# Altium PCB DamperSectionPCB.PcbDoc
Units mil, origin at the board's own origin, x right, y up, seen from the top; angles counter-clockwise.
Board outline 6000 x 6000 mil, 6 copper layers (Top Layer, Internal Plane 1, WireLayer 2, Internal Plane 2, Wire layer 3, Bottom Layer); 85 components, 73 nets, 281 pads, 64 vias.
Unrouted connection lines stored in the file: 2.
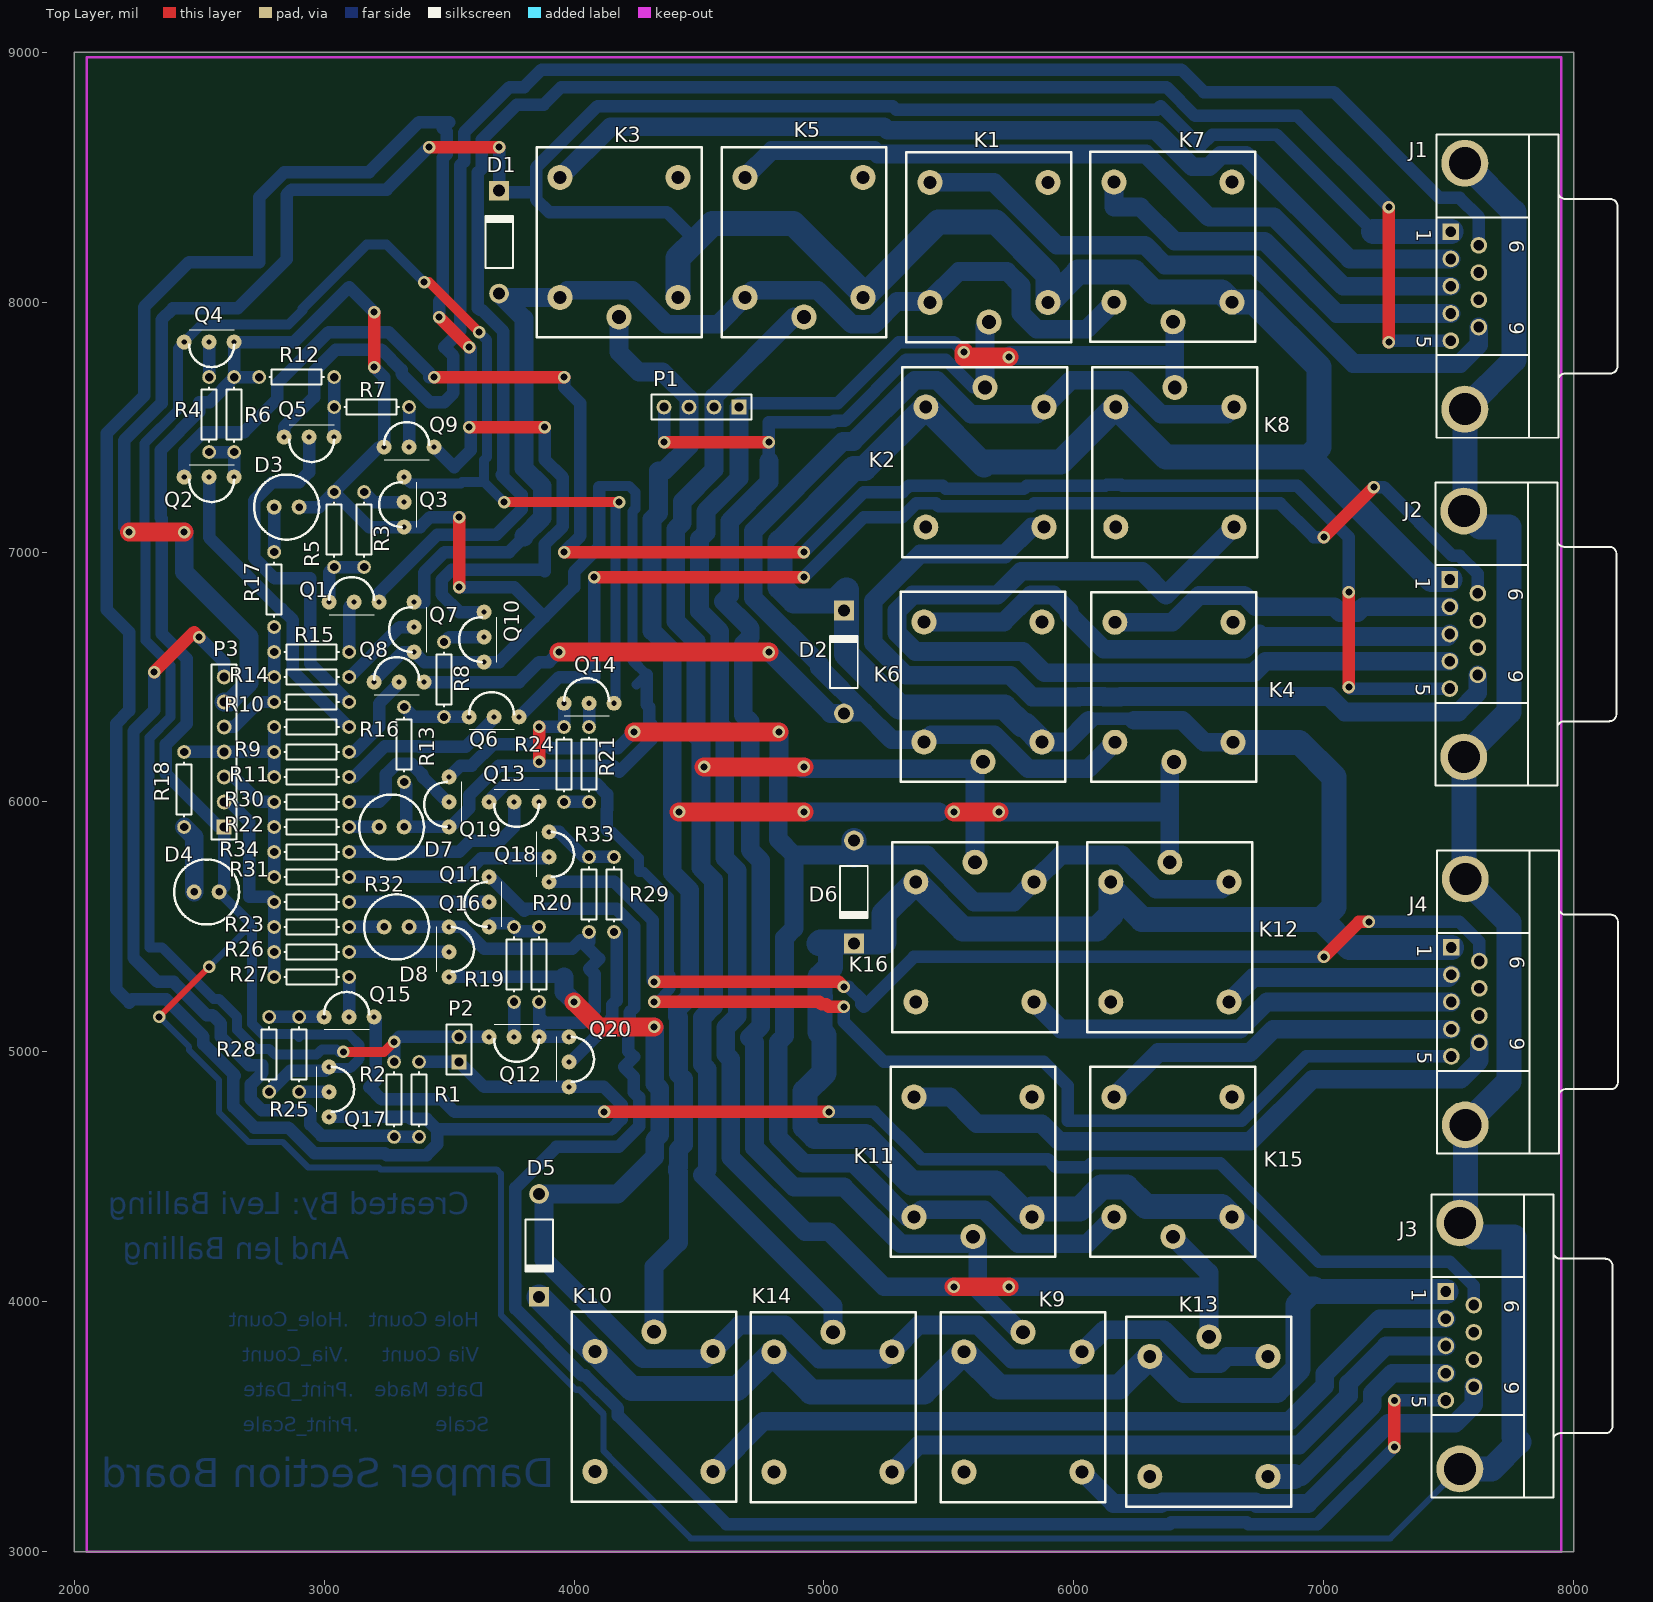
[diagram p0: Top Layer view]
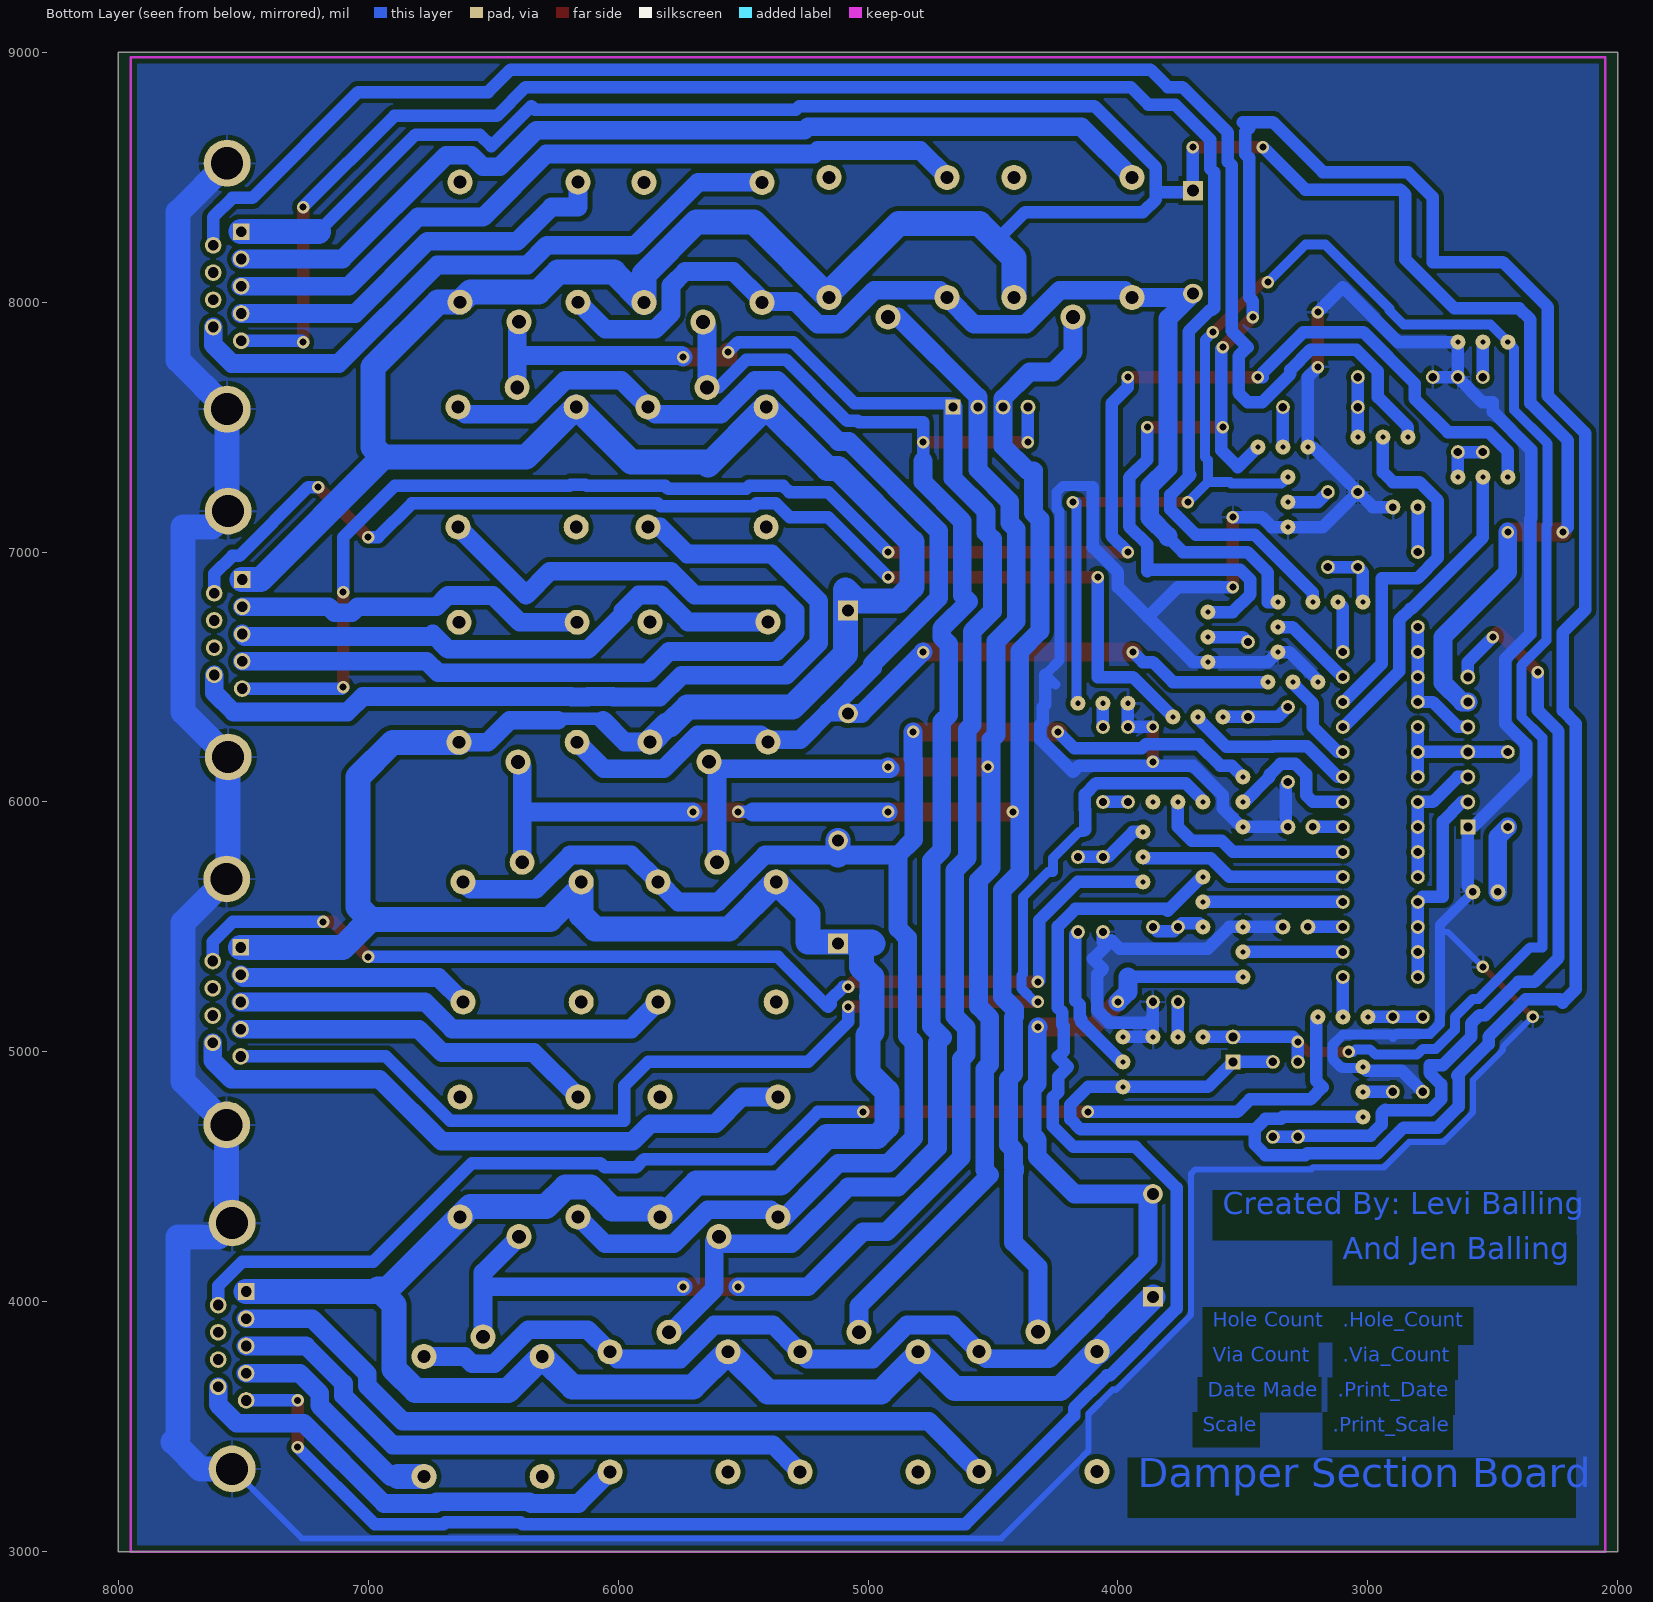
[diagram p1: Bottom Layer view, seen from below]
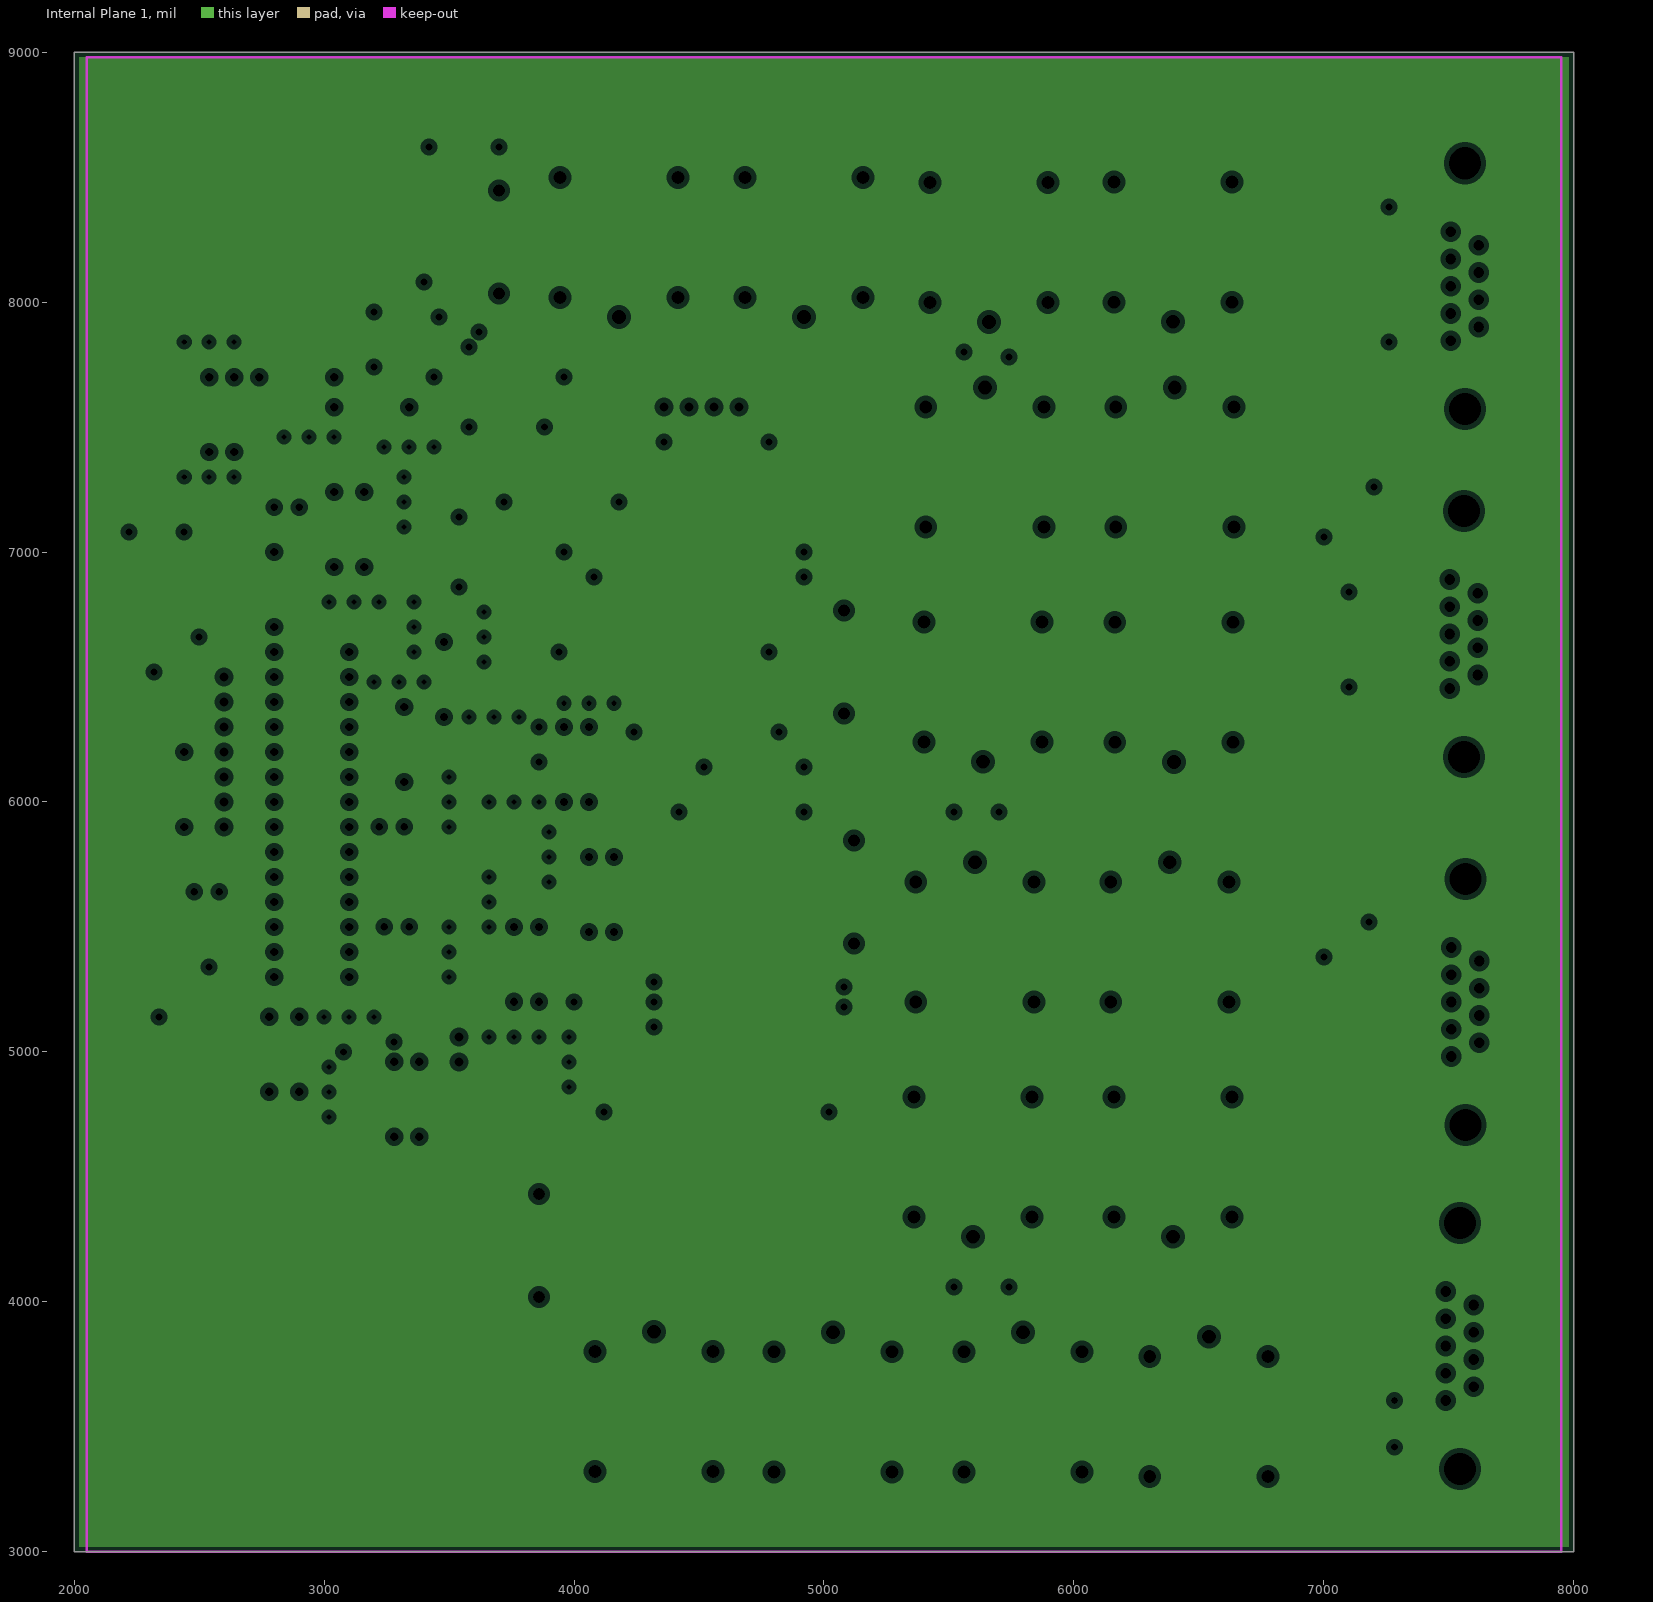
[diagram p2: Internal Plane 1, clearances drawn from the general rule]
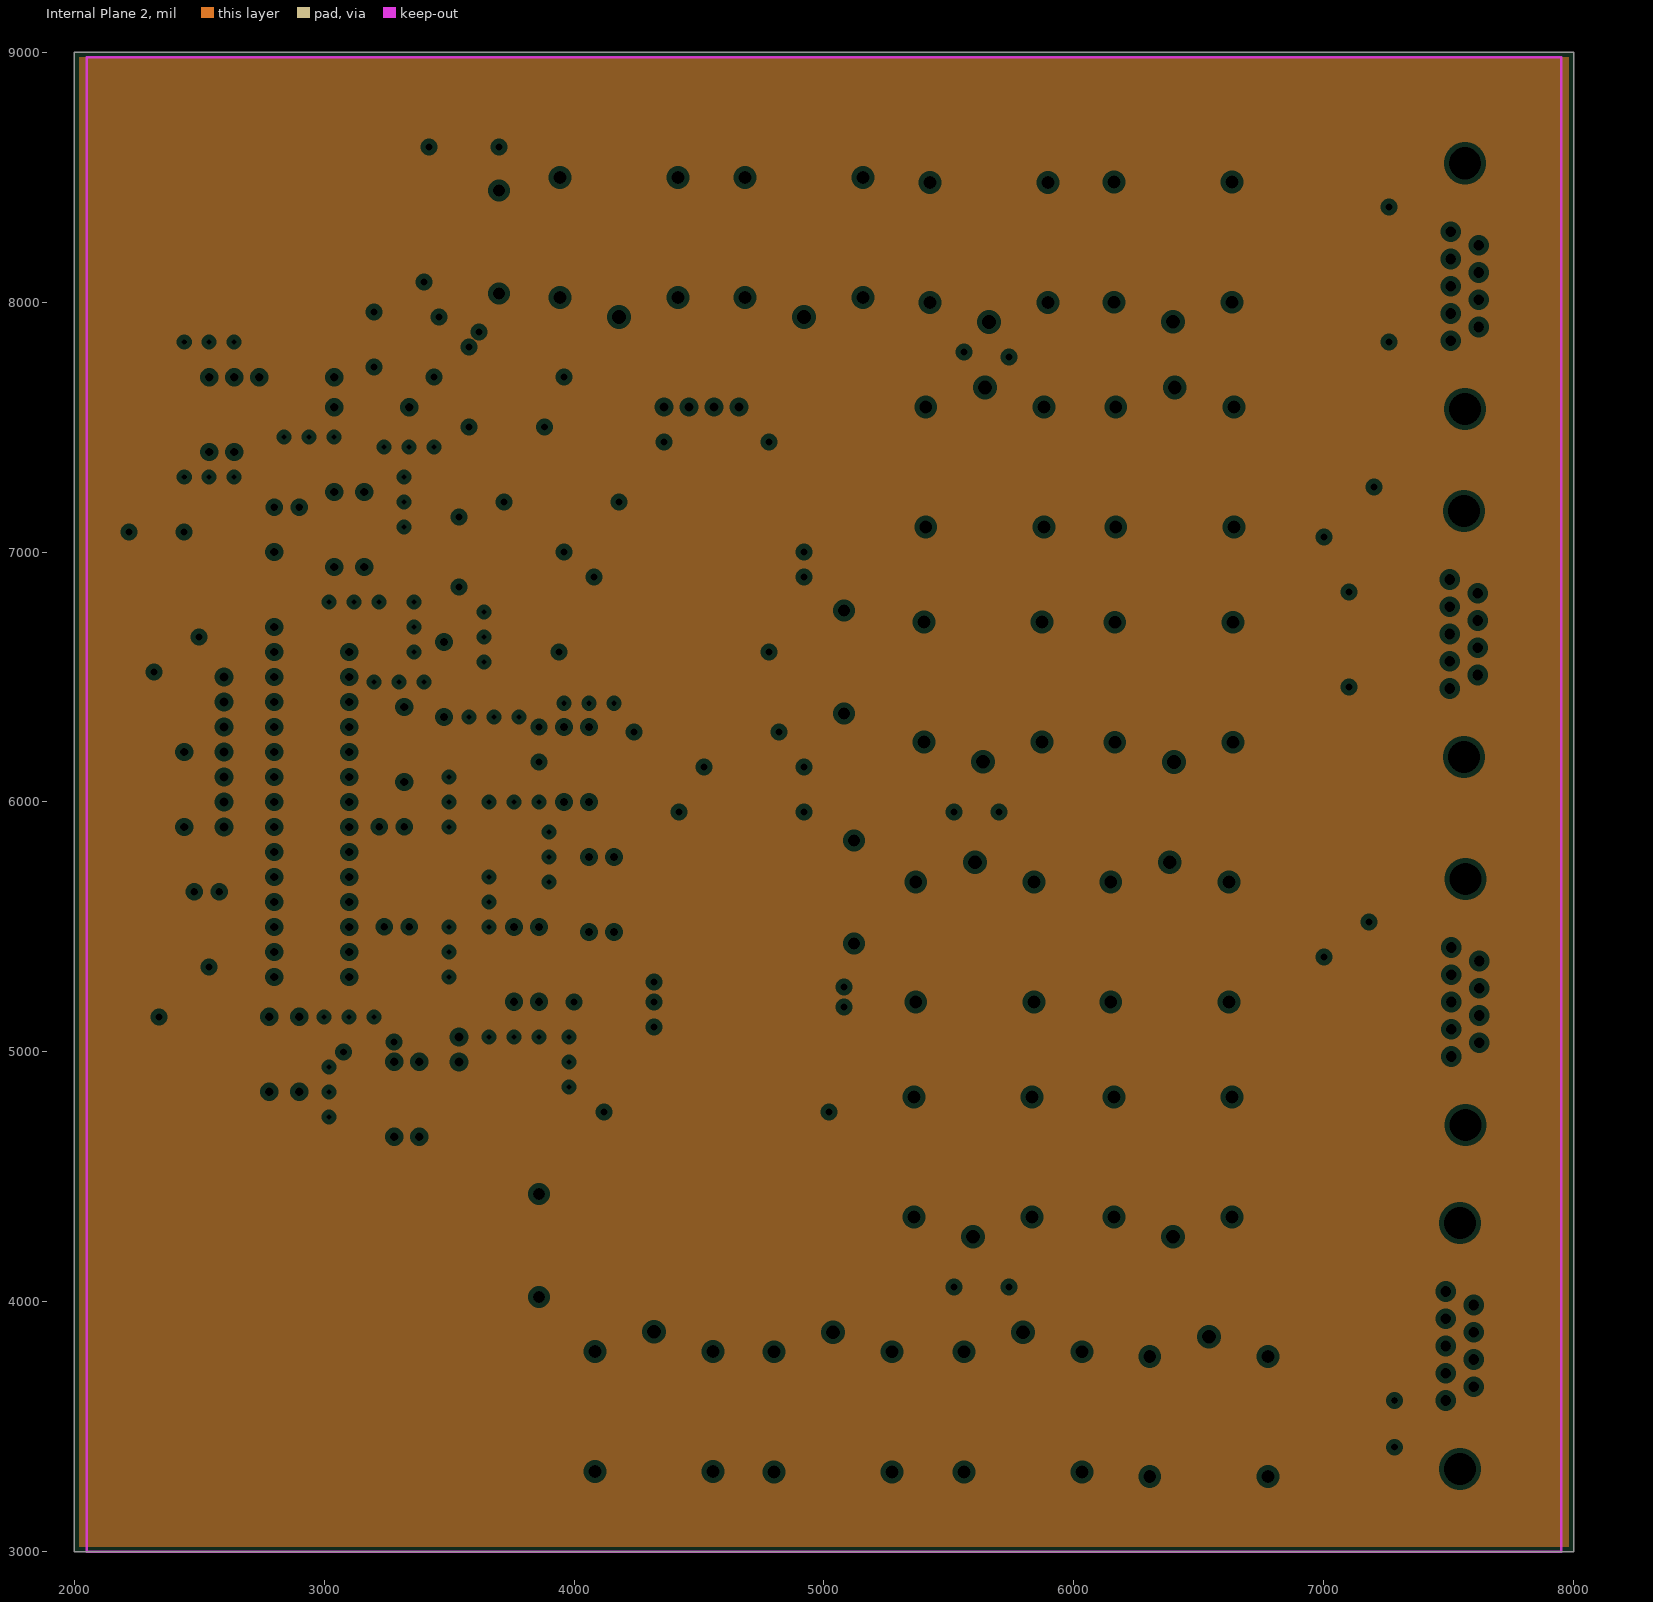
[diagram p3: Internal Plane 2, clearances drawn from the general rule]

## Layer stack, top to bottom
Top Layer: signal copper 1.4
Dielectric: core 12.6, FR-4, Dk 4.8
Internal Plane 1: plane copper 1.4
Dielectric: prepreg 12.6, FR-4, Dk 4.8
WireLayer 2: signal copper 1.4
Dielectric: core 12.6, FR-4, Dk 4.8
Internal Plane 2: plane copper 1.4
Dielectric: prepreg 12.6, FR-4, Dk 4.8
Wire layer 3: signal copper 1.4
Dielectric: core 12.6, FR-4, Dk 4.8
Bottom Layer: signal copper 1.4

## Board outline
2000,3000 8000,3000 8000,9000 2000,9000

## Design rules (kind name [scope] priority, off if disabled: settings)
Clearance [All] p1: gap=20
PlaneClearance [All] p1: clearance=20
PlaneConnect [All] p1: planeconnectstyle=Relief reliefexpansion=20 reliefentries=4 reliefconductorwidth=10 reliefairgap=10
PolygonConnect [All] p1: connectstyle=Relief reliefconductorwidth=10 reliefentries=4 polygonreliefangle="90 Angle"
RoomDefinition DamperSection [InComponentClass('DamperSection')] p1: confinementstyle=ConfineIn formatcopy=TRUE lockcomponents=FALSE outline 7950,3000 2050,3000 2050,8980 7950,8980
RoutingVias [All] p1: holewidth=32 width=62 viastyle="Through Hole" minholewidth=28 minwidth=50 maxholewidth=28 maxwidth=50
SilkscreenOverComponentPads [All] p1: minsilkscreentomaskgap=10
SolderMaskExpansion [All] p1: expansion=4
Width [All] p1: maxlimit=100 minlimit=25 preferedwidth=25 midlayer1_maxwidth=25 midlayer2_maxwidth=25 minimp=50.000000 maximp=50.000000 favimp=50.000000
25 further rules are at their usual default settings.

## Components (designator, comment, footprint, x,y, rotation, side; value= is the part's Value field where it differs from the comment)
D1 "1N4001" DO-41 3700,8240 r90 top
D2 "1N4001" DO-41 5080,6560 r90 top
D3 "LED_White" LED 2800,7180 r0 top
D4 "LED_White" LED 2480,5640 r0 top
D5 "1N4001" DO-41 3860,4225.91 r270 top
D6 "1N4001" DO-41 5120,5640 r270 top
D7 "LED_White" LED 3220,5900 r0 top
D8 "LED_White" LED 3240,5500 r0 top
J1 "D Connector 9" DSUB1.385-2H9 7938.11,8063.58 r270 top
J2 "D Connector 9" DSUB1.385-2H9 7934.02,6671.93 r270 top
J3 "D Connector 9" DSUB1.385-2H9 7918.11,3823.58 r270 top
J4 "D Connector 9" DSUB1.385-2H9 7940,5200 r270 top
K1 "SPDT" "Relay  SPDT Tayda" 5660,7920 r180 top
K2 "SPDT" "Relay  SPDT Tayda" 5643.78,7658.74 r0 top
K3 "SPDT" "Relay  SPDT Tayda" 4180,7940 r180 top
K4 "SPDT" "Relay  SPDT Tayda" 6400,6160 r180 top
K5 "SPDT" "Relay  SPDT Tayda" 4920,7940 r180 top
K6 "SPDT" "Relay  SPDT Tayda" 5636.22,6161.26 r180 top
K7 "SPDT" "Relay  SPDT Tayda" 6396.22,7920.94 r180 top
K8 "SPDT" "Relay  SPDT Tayda" 6403.78,7658.74 r0 top
K9 "SPDT" "Relay  SPDT Tayda" 5796.22,3878.74 r0 top
K10 "SPDT" "Relay  SPDT Tayda" 4320,3880 r0 top
K11 "SPDT" "Relay  SPDT Tayda" 5596.22,4260.94 r180 top
K12 "SPDT" "Relay  SPDT Tayda" 6383.78,5758.74 r0 top
K13 "SPDT" "Relay  SPDT Tayda" 6540,3860 r0 top
K14 "SPDT" "Relay  SPDT Tayda" 5036.22,3878.74 r0 top
K15 "SPDT" "Relay  SPDT Tayda" 6396.22,4260.94 r180 top
K16 "SPDT" "Relay  SPDT Tayda" 5603.78,5759.06 r0 top
P1 "Header 4" HDR1X4 4660,7580 r180 top
P2 "Header 2" HDR1X2 3540,4960 r90 top
P3 "Header 7" HDR1X7 2600,5900 r90 top
Q1 "2N3904" 2N3904 3020,6800 r0 top
Q2 "2N3904" 2N3904 2640,7300 r180 top
Q3 "2N3904" 2N3904 3320,7100 r90 top
Q4 "2N3904" 2N3904 2640,7840 r180 top
Q5 "2N3904" 2N3904 3040,7460 r180 top
Q6 "2N3904" 2N3904 3580,6340 r0 top
Q7 "2N3904" 2N3904 3360,6600 r90 top
Q8 "2N3904" 2N3904 3200,6480 r0 top
Q9 "2N3904" 2N3904 3240,7420 r0 top
Q10 "2N3904" 2N3904 3640,6560 r90 top
Q11 "2N3904" 2N3904 3660,5500 r90 top
Q12 "2N3904" 2N3904 3860,5060 r180 top
Q13 "2N3904" 2N3904 3860,6000 r180 top
Q14 "2N3904" 2N3904 3960,6395 r0 top
Q15 "2N3904" 2N3904 3000,5140 r0 top
Q16 "2N3904" 2N3904 3500,5500 r270 top
Q17 "2N3904" 2N3904 3020,4940 r270 top
Q18 "2N3904" 2N3904 3900,5880 r270 top
Q19 "2N3904" 2N3904 3500,5900 r90 top
Q20 "2N3904" 2N3904 3980,5060 r270 top
R1 "Res1" AXIAL-0.3 3380,4810 r270 top
R2 "Res1" AXIAL-0.3 3280,4810 r270 top
R3 "Res1" AXIAL-0.3 3160,7090 r90 top
R4 "Res1" AXIAL-0.3 2540,7550 r90 top
R5 "Res1" AXIAL-0.3 3040,7090 r270 top
R6 "Res1" AXIAL-0.3 2640,7550 r270 top
R7 "Res1" AXIAL-0.3 3190,7580 r0 top
R8 "Res1" AXIAL-0.3 3480,6490 r90 top
R9 "Res1" AXIAL-0.3 2950,6200 r0 top
R10 "Res1" AXIAL-0.3 2950,6400 r0 top
R11 "Res1" AXIAL-0.3 2950,6100 r0 top
R12 "Res1" AXIAL-0.3 2890,7700 r0 top
R13 "Res1" AXIAL-0.3 3320,6230 r90 top
R14 "Res1" AXIAL-0.3 2950,6500 r0 top
R15 "Res1" AXIAL-0.3 2950,6600 r0 top
R16 "Res1" AXIAL-0.3 2950,6300 r0 top
R17 "Res1" AXIAL-0.3 2800,6850 r90 top
R18 "Res1" AXIAL-0.3 2440,6050 r270 top
R19 "Res1" AXIAL-0.3 3760,5350 r270 top
R20 "Res1" AXIAL-0.3 3860,5350 r90 top
R21 "Res1" AXIAL-0.3 4060,6150 r90 top
R22 "Res1" AXIAL-0.3 2950,5900 r0 top
R23 "Res1" AXIAL-0.3 2950,5500 r0 top
R24 "Res1" AXIAL-0.3 3960,6150 r270 top
R25 "Res1" AXIAL-0.3 2900,4990 r270 top
R26 "Res1" AXIAL-0.3 2950,5400 r0 top
R27 "Res1" AXIAL-0.3 2950,5300 r0 top
R28 "Res1" AXIAL-0.3 2780,4990 r90 top
R29 "Res1" AXIAL-0.3 4160,5630 r270 top
R30 "Res1" AXIAL-0.3 2950,6000 r0 top
R31 "Res1" AXIAL-0.3 2950,5700 r0 top
R32 "Res1" AXIAL-0.3 2950,5600 r0 top
R33 "Res1" AXIAL-0.3 4060,5630 r90 top
R34 "Res1" AXIAL-0.3 2950,5800 r0 top

## Footprints (in the part's own frame and the unit in brackets; to place one, negate y for a bottom-side part, rotate by r counter-clockwise, add the part's x,y. Pads: shape width x height; smd on the part's side, far side on the other; paste and mask are expansions set on the pad)
2N3904 [mil] "simple transistor, but bigger holes and pads"
  round 60 hole 21: 1(0,0) 2(100,0) 3(200,0)
  silkscreen extent 0,-50 180,100
AXIAL-0.3 [mm] "Axial Device, Thru-Hole; 2 Leads; 0.3 in Pin Spacing"
  round 1.4 hole 0.85: 1(-3.81,0) 2(3.81,0)
  silkscreen extent -2.77,-0.76 2.77,0.76
DO-41 [mm] "Diode, Axial; Body 5.2 x 2.7 mm (LxDia. max), Lead Dia. 0.86 mm (max)"
  round 2 hole 1.2: 1(-5.23,0)
  rect 2x2 hole 1.2: 2(5.23,0)
  silkscreen extent -2.65,-1.4 2.75,1.4
DSUB1.385-2H9 [mm] "Connector; D Subminiature; 9 Position; Right Angle; Pitch 1.385 mm"
  rect 1.69x1.69 hole 1.09: 1(-5.54,-10.92)
  round 1.69 hole 1.09: 2(-2.77,-10.92) 3(0,-10.92) 4(2.77,-10.92) 5(5.54,-10.92) 6(-4.155,-8.08) 7(-1.385,-8.08) 8(1.385,-8.08) 9(4.155,-8.08)
  round 4.76 hole 3.26: 10(-12.495,-9.5) 11(12.495,-9.5)
  silkscreen extent -15.4,-12.4 15.4,6
HDR1X2 [mm] "Connector; Header; 2 Position"
  rect 1.5x1.5 hole 0.9: 1(0,0)
  round 1.5 hole 0.9: 2(2.54,0)
  silkscreen extent -1.27,-1.27 3.81,1.27
HDR1X4 [mm] "Connector; Header; 4 Position"
  rect 1.5x1.5 hole 0.9: 1(0,0)
  round 1.5 hole 0.9: 2(2.54,0) 3(5.08,0) 4(7.62,0)
  silkscreen extent -1.27,-1.27 8.89,1.27
HDR1X7 [mm] "Connector; Header; 7 Position"
  rect 1.5x1.5 hole 0.9: 1(0,0)
  round 1.5 hole 0.9: 2(2.54,0) 3(5.08,0) 4(7.62,0) 5(10.16,0) 6(12.7,0) 7(15.24,0)
  silkscreen extent -1.27,-1.27 16.51,1.27
LED [mil] "standard 5mm LED"
  round 60 hole 30: 1(0,0) 2(100,0)
  silkscreen extent -80,-130 180,130
"Relay  SPDT Tayda" [mm] "this is the ATTC-3372"
  round 2.54 hole 1.4: 0(0,0)
  round 2.54 hole 1.3: 1(6,-2) 2(-6,-2) 3(6,-14.2) 4(-6,-14.2)
  silkscreen extent -8.38,-17.27 8.38,2.03

## Part data
D1 D2 D5 D6: "1.0 Ampere General Purpose Rectifier"
D3 D4 D7 D8: library part LED0, "Typical INFRARED GaAs LED"
J1 J2 J3 J4: "Receptacle Assembly, 9 Position, Right Angle"
P1: "Header, 4-Pin"
P2: "Header, 2-Pin"
P3: "Header, 7-Pin"
Q1 Q2 Q3 Q4 Q5 Q6 Q7 Q8 Q9 Q10 Q11 Q12 Q13 Q14 Q15 Q16 Q17 Q18 Q19 Q20: "NPN General Purpose Amplifier"
R1 R2 R3 R4 R5 R6 R7 R8 R9 R10 R11 R12 R13 R14 R15 R16 R17 R18 R19 R20 R21 R22 R23 R24 R25 R26 R27 R28 R29 R30 R31 R32 R33 R34: "Resistor"

## Via types
v1: diameter 50, hole 28, Top Layer to Bottom Layer, 64 vias

## Nets (pads, with @x,y where several pads share a name; then routed paths per layer and width w, separated by ;. In a path a pad name is that pad's centre, name@x,y a point inside that pad or via, vN(x,y) a via of type N, cw(c..) or ccw(c..) an arc to the next point about the centre after c; other vN are vias at no path point)
BUTTONCLOSEBUS: P2.2 Q3.3 Q4.3 Q12.3 Q14.3 R2.1 | length 8071.4
  Top Layer w40: v1(3077.44,5000) 3240,5000 v1(3280,5040) ; v1(3400,8080) 3420,8080 v1(3620,7880) ; v1(3720,7200) v1(4180,7200)
  Bottom Layer w40: v1(3077.44,5000) 3076.94,4999.5 3059.5,4999.5 3048.99,5010 2991.01,5010 2970.5,4989.5 2802.74,4989.5 2779.8,5012.44 2727.16,5012.44 2652.44,5087.16 2652.44,5139.8 2579.68,5212.56 2557.35,5212.56 2352.35,5417.56 2302.44,5417.56 2302.44,6256.98 2385,6339.54 2385,6546.92 2285,6646.92 2285,7106.92 2281.51,7110.41 2281.51,7435.04 2415,7568.53 2415,7815 Q4.3 2510,7910 2857.47,7910 2913.74,7966.26 2913.74,7973.74 3170.6,8230.6 3249.4,8230.6 v1(3400,8080) ; Q3.3 3345,7275 3546.92,7275 3551.92,7280 3640,7280 ; v1(3620,7880) 3652.5,7847.5 3652.5,7380.58 3640,7368.08 3640,7280 ; v1(3720,7200) 3640,7280 ; Q14.3 4165,6400 v1@4165,7200
  Bottom Layer w50: R2.1 v1(3280,5040) 3300,5060 P2.2 Q12.3
BUTTONOPENBUS: P2.1 Q9.3 Q10.3 Q17.3 Q20.3 R1.1 | length 11654.5
  Top Layer w50: v1(3460,7940) v1(3580,7820) ; v1(3580,7500) v1(3882.5,7500)
  Bottom Layer w50: Q17.3 3340,4740 3347.44,4732.56 3410.05,4732.56 3452.61,4690 ; R1.1 P2.1 3640,4860 Q20.3 4118.99,4860 4190,4788.99 4190,4731.01 4148.99,4690 3452.61,4690 ; Q9.3 3520,7340 3587.5,7407.5 3587.5,7812.5 v1(3580,7820) ; v1(3460,7940) 3460,8004.37 3475.63,8020 3475.63,8576.64 3490,8591.01 3490,8681.26 3475.63,8695.63 3500,8720 3380,8720 3180,8520 2841.01,8520 2740,8418.99 2740,8160 2460,8160 2280,7980 2280,7624.45 2130,7474.45 2130,6770 2220,6680 2220,6365.46 2167.44,6312.9 2167.44,5250.95 2220.89,5197.5 2233.39,5210 2368.99,5210 2517.44,5061.55 2517.44,5031.24 2643.54,4905.15 2637.44,4899.05 2637.44,4780.95 2720.95,4697.44 2857.5,4697.44 2959.94,4595 3242.39,4595 3249.95,4587.44 3410.05,4587.44 3452.61,4630 3452.61,4690 ; Q10.3 3541.01,6760 3470,6831.01 3470,6888.99 3511.01,6930 3875,6930 3882.5,6922.5 3882.5,7030.16 3955,7102.66 3955,7297.34 3882.5,7369.84 v1(3882.5,7500)
COILA1BUS: K1.0 K2.0 K9.0 K11.0 P1.4 | length 6447.8
  Top Layer w50: v1(4360,7440) v1(4780,7440)
  Bottom Layer w50: v1(4360,7440) P1.4 ; 4780,7364.45 v1(4780,7440) 4780,7520 5036.95,7520 5041.95,7525 5083.86,7525 5328.86,7770 5486.26,7770 5597.52,7658.74 K2.0 ; K1.0@5643.74,7903.74 5643.78,7903.78 K1.0
  Bottom Layer w75: 4780,7364.45 4780,7280.73 4622.5,7123.23 4622.5,6827.32 4597.22,6802.05 4705,6694.27 4705,6659.35 4677.5,6631.85 4677.5,6348.15 4705,6320.65 4705,5807.65 4747.5,5765.15 4747.5,5102.92 4702.5,5057.92 4722.5,5037.92 4722.5,4616.77 4880,4459.27 5080,4459.27 5307.09,4232.19 5567.46,4232.19 K11.0 5615,4242.17 5615,4050.65 5786.91,3878.74 K9.0 ; K2.0 K1.0@5643.78,7903.78
COILA2BUS: K3.0 K4.0 K10.0 K12.0 P1.3 | length 6824.5
  Top Layer w75: v1(4420,5960) v1(4920,5960) ; v1(5520,5960) v1(5700,5960)
  Bottom Layer w50: 5460,5960 v1(5520,5960)
  Bottom Layer w75: K3.0 4180,7800 4260,7720 4354.35,7720 4460,7614.35 P1.3 4460,7423.33 4361.67,7325 4337.5,7325 4337.5,7155.97 4312.22,7130.7 4312.22,6684 4392.5,6603.72 4392.5,5717.1 4462.5,5647.1 4462.5,5220.97 4412.5,5170.97 4412.5,5141.85 4417.5,5136.85 4417.5,4911.51 4437.5,4891.51 4437.5,4628.49 4417.5,4608.49 4417.5,4540.65 4412.5,4535.65 4412.5,4523.72 4417.5,4518.72 4417.5,4237.5 4320,4140 K10.0 ; v1(4920,5960) 5460,5960 ; v1(5700,5960) 6383.78,5960 ; K12.0 6383.78,5960 ; K4.0 6383.78,6143.78 6383.78,5960
COILB1BUX: K5.0 K6.0 K14.0 K16.0 P1.2 | length 6132.9
  Top Layer w75: v1(4520,6140) v1(4920,6140)
  Bottom Layer w75: v1(4920,6140) 4912.5,6132.5 K6.0@5607.46,6132.5 ; K5.0 4879.63,7940 4560,7620.37 P1.2 4560,7329.43 4432.5,7201.93 4432.5,7116.62 4407.22,7091.35 4407.22,6723.35 4487.5,6643.07 4487.5,6269.45 4507.5,6249.45 4507.5,5736.45 4557.5,5686.45 4557.5,5181.62 4512.5,5136.62 4512.5,4950.86 4532.5,4930.86 4532.5,4527.5 4512.5,4507.5 5036.22,3983.78 K14.0 ; K16.0 5603.78,6128.82 K6.0@5607.46,6132.5 ; K6.0 K6.0@5607.46,6132.5
COILB2BUS: K7.0 K8.0 K13.0 K15.0 P1.1 | length 7900.3
  Top Layer w75: v1(5520,4060) v1(5740,4060) ; v1(5560,7800) 5560,7780 v1(5740,7780)
  Bottom Layer w50: P1.1 4675,7595 5054.86,7595 5299.86,7840 5520,7840 v1(5560,7800)
  Bottom Layer w75: P1.1 4660,7295.08 4527.5,7162.58 4527.5,7077.27 4502.22,7052 4502.22,6762.7 4582.5,6682.42 4582.5,6308.8 4602.5,6288.8 4602.5,5775.8 4652.5,5725.8 4652.5,5142.27 4607.5,5097.27 4607.5,4990.21 4627.5,4970.21 4627.5,4577.42 4924.92,4280 5020,4280 5240,4060 v1(5520,4060) ; v1(5740,4060) 6540,4060 ; v1(5740,7780) 5746.06,7786.06 6403.78,7786.06 ; K15.0 6540,4117.17 6540,4060 ; K7.0 6403.78,7913.39 6403.78,7786.06 ; K8.0 6403.78,7786.06 ; K13.0 6540,4060
DAMPER1: P3.5 R10.1 R14.1 R15.1 R17.1 | length 541.4
  Bottom Layer w50: P3.5 2640,6300 2740,6400 R10.1 R14.1 R15.1 R17.1
DAMPER2: P3.4 R9.1 R11.1 R16.1 R18.1 | length 560
  Bottom Layer w50: R18.1 P3.4 R9.1 ; R11.1 R9.1 ; R16.1 R9.1
DAMPER3: P3.3 R22.1 R30.1 R31.1 R34.1 | length 541.4
  Bottom Layer w50: P3.3 2640,6100 2740,6000 R30.1 R22.1 R34.1 R31.1
DAMPER4: P3.2 R23.1 R26.1 R27.1 R32.1 | length 843
  Bottom Layer w50: P3.2 2622.69,6000 2700,5922.69 2700,5620 2780,5620 R32.1 R23.1 R26.1 R27.1
GND: D3.2 D4.2 D7.2 D8.2 J1.10 J1.11 J2.10 J2.11 J3.10 J3.11 J4.10 J4.11 P3.1 Q3.1 Q4.1 Q7.1 Q8.1 Q9.1 Q10.1 Q12.1 Q14.1 Q16.1 Q17.1 Q19.1 Q20.1 R5.1 R6.1 R12.1 R13.1 R20.1 R24.1 R28.1 R33.1 | length 26482.2
  Top Layer w25: v1(2340,5140) v1(2540,5340)
  Top Layer w50: v1(3200,7740) v1(3200,7960) ; v1(3540,6860) v1(3540,7140) ; v1(3860,6160) v1(3860,6300)
  Bottom Layer w25: v1(2340,5140) 2459.94,5020.06 2459.94,5007.43 2579.94,4887.43 2579.94,4757.13 2697.13,4639.94 2833.68,4639.94 2936.12,4537.5 3218.57,4537.5 3226.13,4529.94 3690.06,4529.94 3707.5,4512.5 3707.5,3948.8 4007.54,3648.76 4020.61,3648.76 4117.95,3551.42 4117.95,3403.44 4166.28,3355.12 4166.28,3353.72 4466.56,3053.44 7265.89,3053.44 J3.11 ; v1(2540,5340) 2680,5480 2712.44,5480
  Bottom Layer w40: D4.2 2712.44,5507.56 2712.44,5480 2712.44,5112.02 2752.02,5072.44 2887.56,5072.44 2900,5060 2910,5070 3099.36,5070 3142.44,5026.92 3142.44,4973.08 3104.36,4935 3025,4935 Q17.1 ; 4100,7260 4105,7265 4220,7265 4245,7240 4245,7173.08 4234.72,7162.8 4234.72,6565.28 4290,6510 4250,6470
  Bottom Layer w50: D4.2 2600,5660 P3.1 2580,5900 2367.44,6112.56 2367.44,6230.05 2450,6312.61 2450,6573.85 2350,6673.85 2350,7133.85 2346.51,7137.34 2346.51,7408.12 2500,7561.61 2500,7600 2542.61,7600 2640,7697.39 R6.1 ; R12.1 R6.1 ; R28.1 2864.5,4924.5 3004.5,4924.5 Q17.1 ; D3.2 2980,7180 R5.1 ; Q8.1 3200,6486.07 3313.93,6600 Q7.1 3400,6560 Q10.1 3700,6560 3880,6740 ; v1(3200,7740) 3240,7700 Q9.1 3220,7420 R5.1 ; v1(3200,7960) 3099.7,8060.3 2879.4,7840 Q4.1 R6.1 ; R13.1 3320,6076.38 3328.69,6067.69 3328.69,5908.69 D7.2 Q19.1 3506.07,5900 3580,5973.93 3580,6026.07 3698.93,6145 3840,6145 ; D8.2 Q16.1 3553.93,5500 3641.32,5412.61 3992.61,5412.61 4026.31,5446.31 4046.31,5426.31 ; v1(3540,6860) 3760,6860 3880,6740 ; v1(3540,7140) 3424.02,7140 3384.02,7100 Q3.1 3180,7100 R5.1 ; R20.1 3860,5140 ; v1(3860,6160) 3855,6160 3840,6145 ; v1(3860,6300) R24.1 Q14.1 ; Q20.1 Q12.1 3860,5140 ; R33.1 4060,5440 4046.31,5426.31 ; 4100,7260 4100,7020 4000,6920 4000,6860 3880,6740 ; 4290,6510 4290,6390 4300,6380 4300,6318.99 4310,6308.99 4310,6250 4180,6120 4155,6145 3840,6145 ; 3860,5140 3882.5,5117.5 4034.17,5117.5 4082.5,5165.83 4082.5,5310.11 4060,5332.61 4100,5372.61 4046.31,5426.31
  Bottom Layer w100: J3.11 7671.65,3331.65 7780,3440 7760,3460 7760,4260 7599.61,4260 J3.10 7565.98,4337.4 J4.11 7740,4882.09 7740,5517.91 J4.10 7560,5697.91 J2.11 7740,6360 7740,7100 7623.86,7100 J2.10 7564.09,7167.95 J1.11 7760,7767.56 7760,8359.61 J1.10
NetD1_1: D1.1 K1.1 K3.1 K5.1 K7.1 Q7.3 | length 4601
  Bottom Layer w50: Q7.3 3400,6800 3400,6917.99 3482.01,7000 3740,7000 3800,7060
  Bottom Layer w75: 3800,7060 3800,7064.33 3872.5,7136.83 3872.5,7263.17 3800,7335.67 3800,7934.09 D1.1 3715.35,8018.74 K3.1 ; K3.1@3972.54,8047.5 4232.5,8047.5 4368.76,7911.24 4576.28,7911.24 K5.1 4712.54,8047.5 4975.43,8047.5 5111.69,7911.24 5200.75,7911.24 5292.01,8002.5 5420.02,8002.5 K1.1 5423.78,8006.85 5539.43,8122.5 5732.41,8122.5 5788.06,8066.85 5788.06,7954.87 5851.69,7891.24 6051.56,7891.24 K7.1
NetD2_1: D2.1 K2.1 K4.1 K6.1 K8.1 Q8.3 | length 6340.8
  Top Layer w75: v1(3940,6600) v1(4780,6600)
  Bottom Layer w50: Q8.3 3780,6480 3860,6560 3900,6560 v1(3940,6600)
  Bottom Layer w75: v1(4780,6600) 5025.91,6354.09 D2.1 5085.91,6360 5160,6360 ; K4.1 6057.54,6132.5 5817.01,6132.5 5680.75,6268.76 5428.76,6268.76 K6.1 5391.01,6248.99 5271.01,6248.99 5160,6360 ; K8.1 6611.24,7551.24 6348.35,7551.24 6212.09,7687.5 5987.5,7687.5 K2.1 5851.24,7551.24 5588.35,7551.24 5452.09,7687.5 5363.03,7687.5 5118.03,7442.5 5076.12,7442.5 4717.5,7083.88 4717.5,6816.12 4982.5,6551.12 4982.5,6537.5 5160,6360
NetD3_1: D3.1 R17.2 | length 180
  Bottom Layer w50: R17.2 D3.1
NetD4_1: D4.1 R18.2 | length 276.6
  Bottom Layer w75: R18.2 2480,5860 D4.1
NetD5_1: D5.1 K9.1 K10.1 K13.1 K14.1 Q16.3 | length 5673.9
  Top Layer w75: v1(4000,5200) 4100,5100 v1(4320,5100)
  Bottom Layer w50: Q16.3 3960,5300
  Bottom Layer w75: 3960,5300 3960,5240 v1(4000,5200) ; v1(4320,5100) 4320,5097.5 4322.5,5095 4322.5,4872.16 4342.5,4852.16 4342.5,4667.84 4322.5,4647.84 4322.5,4580 4174.31,4431.81 D5.1 3880,4411.81 3880,4167.97 4275.47,3772.5 4527.46,3772.5 K10.1 4662.46,3907.5 4844.53,3907.5 4980.79,3771.24 5243.68,3771.24 K14.1 5379.94,3907.5 5615.43,3907.5 5751.69,3771.24 6003.68,3771.24 K9.1 6121.2,3888.76 6359.21,3888.76 6495.47,3752.5 6584.53,3752.5 6613.29,3781.26 K13.1
NetD6_1: D6.1 K11.1 K12.1 K15.1 K16.1 Q19.3 | length 6692.5
  Top Layer w75: v1(4240,6280) v1(4820,6280)
  Bottom Layer w50: Q19.3 3545,6145 3590.06,6145 3675.06,6230 3888.99,6230 3903.99,6215 4175,6215 v1(4240,6280)
  Bottom Layer w75: v1(4820,6280) 4820,6174.35 4817.5,6171.85 4817.5,5850.31 4880,5787.81 ; K15.1 6052.5,4232.19 5777.01,4232.19 5640.75,4368.44 5388.76,4368.44 K11.1 5333.94,4339.69 5175,4498.62 5175,4499.35 5119.35,4555 4918.62,4555 4817.5,4656.12 4817.5,5038.57 4842.5,5063.57 4842.5,5456.65 4880,5494.15 4880,5787.81 ; K12.1 6591.24,5651.24 6328.35,5651.24 6192.09,5787.5 5947.19,5787.5 K16.1 5759.69,5600 5599.9,5600 5412.09,5787.81 5120,5787.81 4880,5787.81
  Bottom Layer w100: 5120,5787.81 D6.1
NetD7_1: D7.1 R22.2 | length 120
  Bottom Layer w50: R22.2 D7.1
NetD8_1: D8.1 R23.2 | length 140
  Bottom Layer w50: R23.2 D8.1
NetJ1_2: J1.2 K3.3 | length 3905.8
  Bottom Layer w75: K3.3 4146.28,8701.56 5240.1,8701.56 5254.15,8687.5 6326.85,8687.5 6473.21,8541.14 6541.55,8541.14 6587.91,8587.5 6687.58,8587.5 7102.44,8172.64 J1.2
NetJ1_3: J1.3 K5.3 | length 3093.8
  Bottom Layer w75: K5.3 4791.28,8606.56 5200.75,8606.56 5214.8,8592.5 6287.5,8592.5 6540,8340 6800.73,8340 7077.15,8063.58 J1.3
NetJ1_4: J1.4 K7.3 | length 1624.4
  Bottom Layer w75: K7.3 6160,8380 6266.38,8380 6402.93,8243.44 6762.93,8243.44 7051.85,7954.53 J1.4
NetJ1_5: J1.5 Q1.3 | length 7018.5
  Top Layer w50: v1(7260,7840) v1(7260,8380)
  Bottom Layer w50: Q1.3 3220,6836.98 3453.02,7070 3688.99,7070 3790,7171.01 3790,7228.99 3710,7308.99 3717.5,7316.49 3717.5,7881.49 3628.99,7970 3621.92,7970 3615.63,7976.29 3615.63,8518.65 3630,8533.02 3630,8648.99 3771.01,8790 3878.82,8790 3948.82,8860 6370.02,8860 6485.01,8745.01 6894.99,8745.01 v1(7260,8380) ; v1(7260,7840) 7265.47,7845.47 J1.5
NetJ1_6: J1.6 Q5.3 | length 6628.7
  Bottom Layer w50: Q5.3 2840,7500 2960,7620 2960,7722.61 3047.39,7810 3228.99,7810 3310,7728.99 3310,7712.61 3412.56,7610.05 3422.61,7600 3481.01,7600 3517.5,7636.49 3517.5,7783.51 3481.01,7820 3545.63,7884.62 3545.63,8547.64 3560,8562.01 3560,8677.99 3742.01,8860 3800,8860 3870,8930 6430,8930 6520,8840 7040,8840 7463.19,8416.81 7543.19,8416.81 7620,8340 J1.6
NetJ1_9: J1.9 K1.3 | length 2598.1
  Bottom Layer w75: K1.3 5679.91,8479.06 5931.78,8227.19 6284.84,8227.19 6363.58,8148.44 6723.58,8148.44 7117.32,7754.7 7545.79,7754.7 7620,7828.92 J1.9
NetJ2_2: J2.2 K4.3 | length 1423.2
  Bottom Layer w75: K4.3 6393.72,6719.06 6501.22,6826.56 6680.75,6826.56 6726.32,6780.98 7042.34,6780.98 7065.83,6757.5 7134.17,6757.5 7157.66,6780.98 J2.2
NetJ2_3: J2.3 K6.3 | length 2279.2
  Bottom Layer w75: K6.3 5720.41,6720.31 5827.91,6827.81 5916.97,6827.81 5979.94,6764.84 5979.94,6750.87 6119.25,6611.56 6680.75,6611.56 6741.12,6671.93 6750.55,6662.5 7494.67,6662.5 J2.3
NetJ2_4: J2.4 K8.3 | length 3950.7
  Bottom Layer w75: K8.3 6368.13,6827.81 6273.13,6922.81 5788.56,6922.81 5693.56,6827.81 5355.47,6827.81 5292.5,6764.84 5292.5,6675.79 5365.79,6602.5 5795.91,6602.5 5881.85,6516.56 6720.1,6516.56 6766.42,6562.87 J2.4
NetJ2_5: J2.5 Q2.3 | length 7049.4
  Top Layer w50: v1(3440,7700) v1(3960,7700) ; v1(3960,7000) v1(4920,7000) ; v1(7100,6460) v1(7100,6840)
  Bottom Layer w50: Q2.3 2440,7402.61 2517.39,7480 2680,7480 2812.56,7612.56 2812.56,7674.17 3018.39,7880 3257.99,7880 3421.61,7716.38 3421.61,7700 v1(3440,7700) ; v1(3960,7000) 4025,7065 4025,7595 3960,7660 v1(3960,7700) ; v1(4920,7000) 5160,7240 5314.53,7240 5339.21,7264.69 5475.9,7264.69 5488.03,7252.56 5799.53,7252.56 5811.65,7264.69 6125.69,7264.69 6131.01,7270 6188.99,7270 6194.31,7264.69 6894.31,7264.69 7100,7058.99 v1(7100,6840) ; v1(7100,6460) 7106.18,6453.82 J2.5
NetJ2_6: J2.6 Q6.3 | length 4773.9
  Top Layer w50: v1@4100,6900 v1(4920,6900) ; v1(7000,7060) v1(7200,7260)
  Bottom Layer w50: Q6.3 3940,6500 4080,6500 v1(4080,6900) ; v1(4920,6900) 5160,7140 5313.52,7140 5368.21,7194.69 5446.91,7194.69 5459.04,7182.56 5828.52,7182.56 5840.65,7194.69 6825.31,7194.69 6960,7060 v1(7000,7060) ; v1(7200,7260) 7240,7260 7514.96,6985.04 7543.44,6985.04 7615.91,6912.58 J2.6
NetJ2_9: J2.9 K2.3 | length 3611.2
  Bottom Layer w75: K2.3 5831.08,7099.69 5723.58,6992.19 5385.49,6992.19 5197.5,6804.19 5197.5,6636.44 5326.44,6507.5 5746.06,6507.5 5833.56,6420 6019.09,6420 6020.65,6421.56 6119.35,6421.56 6120.91,6420 6185.65,6420 6187.2,6421.56 7021.77,6421.56 7083.33,6360 7538.64,6360 7615.91,6437.27 J2.9
NetJ3_2: J3.2 K10.3 | length 3214.1
  Bottom Layer w75: K10.3 4757.46,3522.19 6862.19,3522.19 7003.72,3663.72 7003.72,3712.87 7223.49,3932.64 J3.2
NetJ3_3: J3.3 K14.3 | length 2453.3
  Bottom Layer w75: K14.3 5379.94,3427.19 6901.54,3427.19 7098.72,3624.37 7098.72,3673.52 7248.78,3823.58 J3.3
NetJ3_4: J3.4 K13.3 | length 912.1
  Bottom Layer w75: 6880.94,3300.94 6909.65,3300.94 7193.72,3585.02 7193.72,3634.17 7274.08,3714.53 J3.4
  Bottom Layer w100: K13.3 6880.94,3300.94
NetJ3_5: J3.5 Q11.3 | length 7027.2
  Top Layer w50: v1(7281.69,3418.31) v1(7281.69,3605.47)
  Bottom Layer w50: Q11.3 3666.07,5700 3801.31,5564.76 3809.11,5572.56 4170.05,5572.56 4240,5502.61 4240,5176.67 4222.5,5159.17 4222.5,5107.84 4217.5,5102.84 4217.5,5002.5 4240,4980 4200,4940 4239.5,4900.5 4239.5,4838.49 4260,4817.99 4260,4702.01 4177.99,4620 3928.87,4620 3765,4456.13 3765,3972.62 4031.36,3706.26 4044.43,3706.26 4175.45,3575.24 4175.45,3544.55 4609.06,3110.94 6382.48,3110.94 6389.04,3117.5 6690.96,3117.5 6697.52,3110.94 6974.33,3110.94 v1(7281.69,3418.31) ; v1(7281.69,3605.47) J3.5
NetJ3_6: J3.6 Q15.3 | length 5134.3
  Top Layer w50: v1(4120,4760) v1(5020,4760)
  Bottom Layer w50: Q15.3 3207.44,5132.56 3207.44,4946.15 3207.44,4885.52 3180.96,4859.04 3230,4810 3472.56,4810 3522.56,4760 v1(4120,4760) ; v1(5020,4760) 5200.73,4760 5389.78,4570.94 5895.71,4570.94 5928.87,4537.79 6054.04,4537.79 6070.94,4554.69 6585.31,4554.69 6980,4160 7504.23,4160 7600,4064.23 J3.6
NetJ3_9: J3.9 K9.3 | length 1860.2
  Bottom Layer w75: K9.3 6158.68,3193.44 6348.31,3193.44 6354.86,3200 6725.14,3200 6731.69,3193.44 6936.5,3193.44 7257.76,3514.7 7525.79,3514.7 7600,3588.92 J3.9
NetJ4_2: J4.2 K12.3 | length 935.4
  Bottom Layer w75: K12.3 6717.81,5297.5 7498.52,5297.5 J4.2
NetJ4_3: J4.3 K16.3 | length 1759.4
  Bottom Layer w75: K16.3 5947.81,5092.19 6664.53,5092.19 6772.34,5200 J4.3
NetJ4_4: J4.4 K15.3 | length 1462.3
  Bottom Layer w75: K15.3 6337.19,4997.19 6703.88,4997.19 6797.64,5090.94 J4.4
NetJ4_5: J4.5 Q13.3 | length 5127
  Top Layer w50: v1(4320,5200) 4981.01,5200 4991.01,5190 5010,5190 5020,5180 v1(5080,5180)
  Bottom Layer w40: 4132.56,5887.44 4140,5880 4155.54,5880 4260,5775.54 4260,5720 4280,5720 4380,5620 4380,5311.92 4385,5306.92 4385,5253.08 4331.92,5200 v1(4320,5200)
  Bottom Layer w50: Q13.3 3660,6006.07 3728.93,6075 4087.61,6075 4132.56,6030.05 4132.56,5969.95 4130.8,5968.19 4130.8,5889.2 4132.56,5887.44 ; v1(5080,5180) 5080,5120 5240,4960 5880,4960 5975,4865 5975,4725 6671.79,4725 6928.68,4981.89 J4.5
NetJ4_6: J4.6 Q18.3 | length 4332.4
  Top Layer w50: v1(4320,5280) 5060,5280 v1(5080,5260) ; v1(7000,5380) 7140,5520 v1(7180,5520)
  Bottom Layer w50: Q18.3 4161.61,5680 4315,5526.61 4315,5285 v1(4320,5280) ; v1(5080,5260) 5098.99,5260 5150,5208.99 5150,5190 5160,5180 5360,5380 v1(7000,5380) ; v1(7180,5520) 7542.54,5520 7621.89,5440.65 J4.6
NetJ4_9: J4.9 K11.3 | length 2540.2
  Bottom Layer w75: K11.3 5504.15,4820 5611.65,4712.5 5870.83,4712.5 5940.83,4642.5 6705.96,4642.5 6954.59,4891.12 7547.68,4891.12 7621.89,4965.34 J4.9
NetQ1_1: Q1.1 R3.1 R5.2 | length 268.3
  Bottom Layer w50: Q1.1 3020,6920 R5.2 R3.1
NetQ1_2: Q1.2 R15.2 | length 208.3
  Bottom Layer w50: R15.2 3100,6780 Q1.2
NetQ2_1: Q2.1 R4.1 R6.2 | length 200
  Bottom Layer w50: R4.1 R6.2 Q2.1
NetQ2_2: Q2.2 R16.2 | length 1236
  Bottom Layer w50: Q2.2 2540,7058.39 2825.83,6772.56 2830.05,6772.56 2875,6727.61 2875,6522.39 3097.39,6300 R16.2
NetQ3_2: Q3.2 R3.2 | length 176.6
  Bottom Layer w50: R3.2 3200,7200 Q3.2
NetQ4_2: Q4.2 R4.2 | length 140
  Bottom Layer w50: R4.2 Q4.2
NetQ5_1: Q5.1 R7.1 R12.2 | length 240
  Bottom Layer w50: Q5.1 R7.1 R12.2
NetQ5_2: Q5.2 R10.2 | length 1455.7
  Bottom Layer w50: Q5.2 2940,7320 2900,7280 2793.93,7280 2720,7206.07 2720,6977.39 2802.39,6895 2945,6895 2945,6552.39 3097.39,6400 R10.2
NetQ6_1: Q6.1 R8.1 R13.2 | length 276.6
  Bottom Layer w50: R13.2 3360,6340 R8.1 Q6.1
NetQ6_2: Q6.2 R11.2 | length 685.1
  Bottom Layer w50: R11.2 3120,6100 3242.56,6222.56 3379.05,6222.56 3381.61,6220 3566.07,6220 3680,6333.93 Q6.2
NetQ7_2: Q7.2 R14.2 | length 342.8
  Bottom Layer w50: R14.2 3102.61,6500 3302.61,6700 Q7.2
NetQ8_2: Q8.2 R9.2 | length 374.6
  Bottom Layer w50: R9.2 3120,6200 3220,6300 3220,6393.93 3300,6473.93 Q8.2
NetQ9_2: Q9.2 R7.2 | length 160
  Bottom Layer w50: Q9.2 R7.2
NetQ10_2: Q10.2 R8.2 | length 168.3
  Bottom Layer w50: R8.2 3500,6660 Q10.2
NetQ11_1: Q11.1 R19.1 R20.2 | length 227.4
  Bottom Layer w50: Q11.1 3675.66,5515.66 3744.34,5515.66 R19.1 3777.39,5482.61 3842.61,5482.61 R20.2
NetQ11_2: Q11.2 R32.2 | length 560
  Bottom Layer w50: R32.2 Q11.2
NetQ12_2: Q12.2 R19.2 | length 140
  Bottom Layer w50: Q12.2 R19.2
NetQ13_1: Q13.1 R21.1 R24.2 | length 100
  Bottom Layer w50: R24.2 R21.1
NetQ13_2: Q13.2 R34.2 | length 801.4
  Bottom Layer w50: R34.2 3540,5800 3585,5845 3705,5845 3760,5900 Q13.2
NetQ14_2: Q14.2 R21.2 | length 95
  Bottom Layer w50: R21.2 Q14.2
NetQ15_1: Q15.1 R25.1 R28.2 | length 220
  Bottom Layer w50: R28.2 R25.1 Q15.1
NetQ15_2: Q15.2 R27.2 | length 160
  Bottom Layer w50: Q15.2 R27.2
NetQ16_2: Q16.2 R26.2 | length 400
  Bottom Layer w50: R26.2 Q16.2
NetQ17_2: Q17.2 R25.2 | length 120
  Bottom Layer w50: R25.2 Q17.2
NetQ18_1: Q18.1 R29.1 R33.2 | length 301.4
  Bottom Layer w50: Q18.1 3940,5880 4040,5780 R33.2 R29.1
NetQ18_2: Q18.2 R31.2 | length 833.1
  Bottom Layer w50: R31.2 3553.93,5700 3628.93,5775 3895,5775 Q18.2
NetQ19_2: Q19.2 R30.2 | length 579.9
  Bottom Layer w50: R30.2 3220,6000 3247.44,6027.44 3247.44,6110.05 3289.95,6152.56 3350.05,6152.56 3392.56,6110.05 3392.56,6102.82 3398.69,6096.68 3398.69,6095.24 3493.93,6000 Q19.2
NetQ20_2: Q20.2 R29.2 | length 606.4
  Bottom Layer w50: Q20.2 3986.07,4960 4147.5,5121.43 4147.5,5131.83 4152.5,5136.83 4152.5,5188.17 4170,5205.67 4170,5470 R29.2
VCC: P3.7 R1.2 R2.2 | length 3277.6
  Top Layer w50: v1(2320,6520) 2480,6680 v1(2500,6660)
  Bottom Layer w50: v1(2320,6520) 2320,6366.46 2237.44,6283.9 2237.44,5376.44 2333.88,5280 2397.99,5280 2530.43,5147.56 2552.75,5147.56 2587.44,5112.87 2587.44,5060.24 2700.24,4947.44 2752.87,4947.44 2753.56,4946.75 2753.56,4916.18 2707.44,4870.05 2707.44,4809.95 2749.95,4767.44 2930.05,4767.44 2931.46,4768.85 2945,4755.31 2945,4708.93 2988.93,4665 3275,4665 R2.2 R1.2 ; v1(2500,6660) 2600,6560 P3.7
VCC12: D1.2 D2.2 D5.2 D6.2 J1.1 J2.1 J3.1 J4.1 K1.2 K2.2 K3.2 K4.2 K5.2 K6.2 K7.2 K8.2 K9.2 K10.2 K11.2 K12.2 K13.2 K14.2 K15.2 K16.2 P3.6 | length 30628.5
  Top Layer w50: v1(3420,8620) v1(3700,8620)
  Top Layer w75: v1(2220,7080) v1(2440,7080)
  Bottom Layer w50: v1(2220,7080) 2200,7100 2200,7445.46 2350,7595.46 2350,7930 2395,7975 2653.99,7975 2850,8171.01 2850,8430 2870,8450 3250,8450 v1(3420,8620) ; v1(3700,8620) D1.2 3705.91,8440 3848.78,8440 ; 4485.59,8245.59 4371.18,8360 3900,8360 3848.78,8411.22 3848.78,8440 ; 6060,6326.56 6067.19,6333.74 6232.81,6333.74 6240,6326.56 ; 7198.31,8281.69 6810,8670 6553.74,8670 6507.38,8623.64 6346.97,8784.06 6332.91,8770 5288.33,8770 5274.27,8784.06 4094.43,8784.06 3848.78,8538.41 3848.78,8440
  Bottom Layer w75: v1(2440,7080) 2440,6920 2700,6660 2700,6476.92 2623.08,6400 P3.6 ; K6.2 5973.44,6240 6060,6326.56 ; 6240,6326.56 6433.44,6326.56 6521.26,6238.74 K4.2
  Bottom Layer w100: D5.2 4078.74,3801.26 K10.2 4232.54,3652.5 4652.5,3652.5 K14.2 4800,3787.97 4947.97,3640 5400,3640 K9.2 5700,3660 6182.52,3660 K13.2 6440.04,3645 6809.67,3645 6896.22,3731.55 6896.22,3988.35 6960,4052.13 6920,4052.13 K15.2 6591.18,4380.94 6288.45,4380.94 6209.71,4459.69 6110.29,4459.69 6023.05,4372.44 5832.44,4372.44 K11.2 5832.44,4359.59 5801.63,4359.59 5685.28,4475.94 5349.7,4475.94 5282.5,4543.15 5282.5,4543.88 5163.88,4662.5 4963.15,4662.5 4925,4700.65 4925,4841.28 5000,4916.28 5000,5065.65 4985,5080.65 4985,5219.35 4985.65,5220 4985,5220.65 4985,5299.35 5025.65,5340 5025.65,5440 ; K3.2 4416.22,8176.22 4485.59,8245.59 4554.96,8314.96 4877.07,8314.96 5156.22,8035.81 K5.2 5457.48,8320 5686.94,8320 5896.22,8110.72 K1.2 6017.17,8119.69 6240.31,8119.69 6319.06,8040.94 6591.18,8040.94 K7.2 6720.31,7999.69 6980,7740 6980,7420 6940,7380 ; 4980,5434.09 4985.91,5440 5240,5440 ; 5060,5440 5240,5440 ; K6.2 5804.94,6307.5 5794.04,6307.5 5721.54,6380 5301.91,6380 5090,6591.91 5090,6848.72 5046.28,6805 4880.65,6805 4825,6860.65 4825,7039.35 5120.65,7335 5162.56,7335 K2.2 5640,7347.56 5652.13,7359.69 5947.24,7359.69 K8.2 6367.56,7380 6940,7380 ; K4.2 6901.26,6238.74 7040,6100 7040,5580 6990,5530 ; 6970.43,4041.69 J3.1 ; 7198.31,8281.69 J1.1 ; J2.1 7429.96,6890.04 6940,7380 ; J4.1 7101.89,5418.11 6990,5530 ; 5240,5440 5240,5552.76 K16.2 5555.37,5492.5 6092.5,5492.5 6147.56,5547.56 K12.2 6147.56,5655.47 6273.03,5530 6990,5530
pads on no net: J1.7 J1.8 J2.7 J2.8 J3.7 J3.8 J4.7 J4.8 K1.4 K2.4 K3.4 K4.4 K5.4 K6.4 K7.4 K8.4 K9.4 K10.4 K11.4 K12.4 K13.4 K14.4 K15.4 K16.4

## Polygon pours and split planes (outlines as drawn)
GND on Bottom Layer "GndPlane" (solid, pour order 2): 2050,8980 7950,8980 7950,3000 2050,3000
no net on Internal Plane 1 (split plane): 7979.9,3020.1 2020.1,3020.1 2020.1,8979.9 7979.9,8979.9
no net on Internal Plane 2 (split plane): 7979.9,3020.1 2020.1,3020.1 2020.1,8979.9 7979.9,8979.9

## Keep-outs
Keep-Out Layer:
  lines w10: 2050,3000 7950,3000 7950,8980 2050,8980 2050,3000

## Other copper
Bottom Layer:
  text "Created By: Levi Balling" at 3580,4320 h150
  text "And Jen Balling" at 3100,4140 h150
  text ".Hole_Count" at 3100,3880 h100
  text "Hole Count" at 3620,3880 h100
  text ".Via_Count" at 3100,3740 h100
  text "Via Count" at 3620,3740 h100
  text ".Print_Date" at 3120,3600 h100
  text "Date Made" at 3640,3600 h100
  text ".Print_Scale" at 3140,3460 h100
  text "Scale" at 3660,3460 h100
  text "Damper Section Board" at 3920,3220 h200

## Silkscreen, mask and mechanical layers (free items; w line width, h text height)
Drill Drawing:
  text ".LEGEND" at 8200,3200 h60
  text "Drill Drawing." at 8200,3100 h60

## Dimensions
2050,3000 to 7950,3000 on Mechanical 1
2050,3000 to 2050,8980 on Mechanical 1

## Text inside footprints (layer, text, board x,y; h text height)
J1: Top Overlay "1" at 7372.17,8291.54 h59.06 r270; Top Overlay "5" at 7372.17,7865.16 h59.06 r270; Top Overlay "9" at 7742.24,7919.68 h59.06 r270; Top Overlay "6" at 7742.24,8246.85 h59.06 r270
J2: Top Overlay "1" at 7368.07,6899.88 h59.06 r270; Top Overlay "5" at 7368.07,6473.5 h59.06 r270; Top Overlay "9" at 7738.15,6528.03 h59.06 r270; Top Overlay "6" at 7738.15,6855.2 h59.06 r270
J3: Top Overlay "1" at 7352.17,4051.54 h59.06 r270; Top Overlay "5" at 7352.17,3625.16 h59.06 r270; Top Overlay "9" at 7722.24,3679.68 h59.06 r270; Top Overlay "6" at 7722.24,4006.85 h59.06 r270
J4: Top Overlay "1" at 7374.06,5427.95 h59.06 r270; Top Overlay "5" at 7374.06,5001.57 h59.06 r270; Top Overlay "9" at 7744.13,5056.1 h59.06 r270; Top Overlay "6" at 7744.13,5383.27 h59.06 r270